# Altium PCB 加速度传感器-fa.PcbDoc
Units mm, origin at the board's own origin, x right, y up, seen from the top; angles counter-clockwise.
Board outline 152.4 x 101.6 mm, 2 copper layers (Top Layer, Bottom Layer); 11 components, 11 nets, 42 pads, 2 vias.
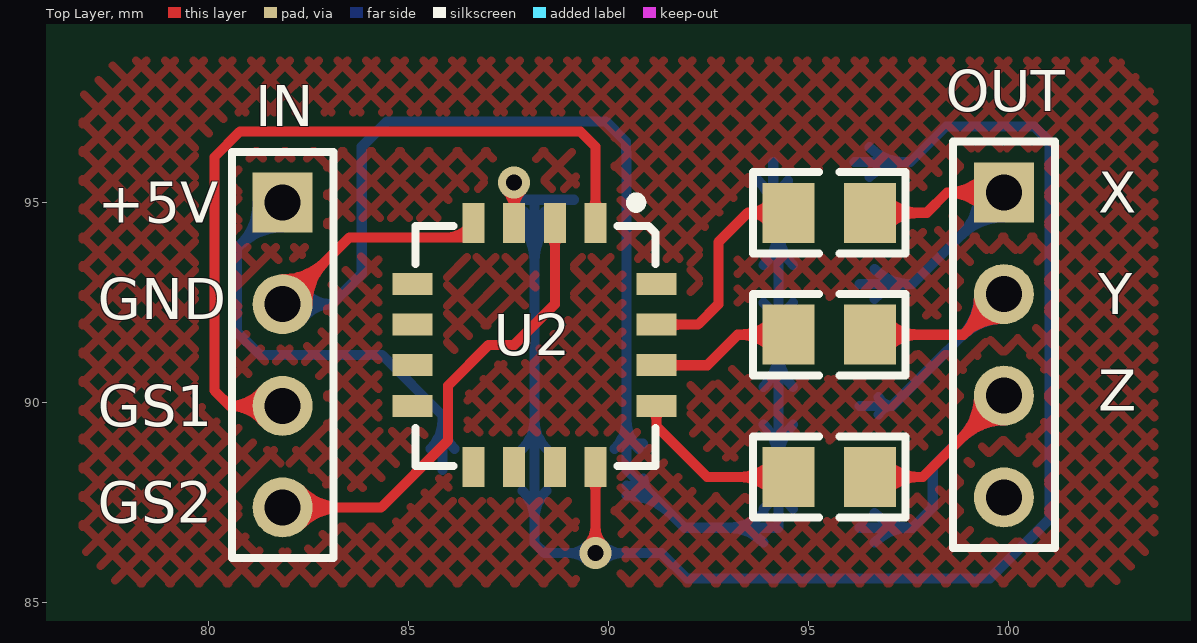
[diagram p0: Top Layer view]
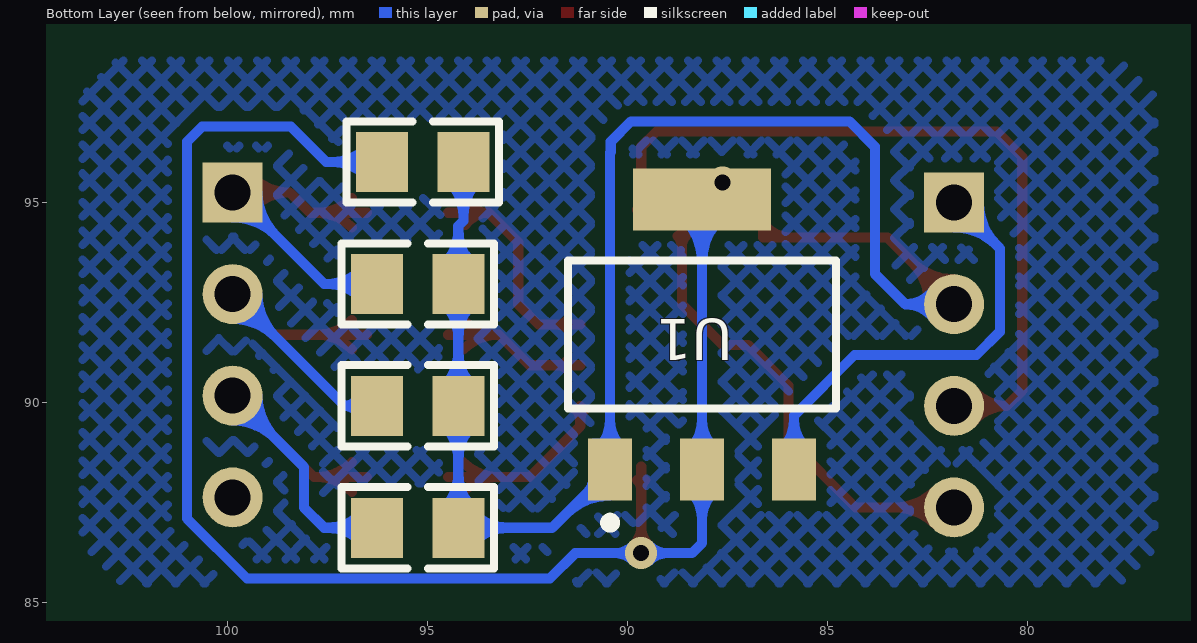
[diagram p1: Bottom Layer view, seen from below]

## Layer stack, top to bottom
Top Layer: signal copper 0.0356
Dielectric: dielectric 0.32, FR-4, Dk 4.8
Bottom Layer: signal copper 0.0356

## Board outline
25.4,25.4 177.8,25.4 177.8,127 25.4,127

## Design rules (kind name [scope] priority, off if disabled: settings)
Clearance [All] p1: gap=0.254
ComponentClearance [All] p1: gap=0.254 collisioncheckmode=3 verticalgap=0.254
PolygonConnect [All] p1: connectstyle=Relief reliefconductorwidth=0.254 reliefentries=4 polygonreliefangle="90 Angle"
RoomDefinition 加速度传感器 [InComponentClass('加速度传感器')] p1: confinementstyle=ConfineIn formatcopy=TRUE lockcomponents=FALSE outline 0,0 50.8,0 50.8,25.4 0,25.4
RoutingVias [All] p1: holewidth=0.711 width=1.27 viastyle="Through Hole" minholewidth=0.711 minwidth=1.27 maxholewidth=0.711 maxwidth=1.27
SolderMaskExpansion [All] p1: expansion=0.102
TestPointUsage [All] p1: valid=0 allowmultiple=FALSE
Testpoint [All] p1: side=15 testpointundercomponent=TRUE minsize=1.016 maxsize=2.54 preferedsize=1.524 minholesize=0 maxholesize=1.016 preferedholesize=0.813 testpointgrid=0.025 style=1023 order=0123456789
Width [All] p1: maxlimit=0.254 minlimit=0.254 preferedwidth=0.254
17 further rules are at their usual default settings.

## Classes and differential pairs
component class 加速度传感器: IN MMA7260 OUT U1 U2 U? ""

## Components (designator, comment, footprint, x,y, rotation, side; value= is the part's Value field where it differs from the comment)
C1 "CPDR" TP-0805-R 97.663,97.282 r0 bottom
C2 "CPDR" TP-0805-R 97.79,94.234 r0 bottom
C3 "CPDR" TP-0805-R 97.79,91.186 r0 bottom
C4 "CPDR" TP-0805-R 97.79,88.138 r0 bottom
IN "PZ_4" HDR-4 80.518,88.646 r270 top
OUT "PZ_4" HDR-4 98.552,88.9 r270 top
R1 "Res" TP-0805-R 98.044,93.472 r0 top
R2 "Res" TP-0805-R 98.044,90.424 r0 top
R3 "Res" TP-0805-R 98.044,86.868 r0 top
U1 "REG1117-3.3" ZZ311 88.138,91.694 r180 bottom
U2 "MMA7260" A7260 89.662,94.234 r270 top

## Footprints (in the part's own frame and the unit in brackets; to place one, negate y for a bottom-side part, rotate by r counter-clockwise, add the part's x,y. Pads: shape width x height; smd on the part's side, far side on the other; paste and mask are expansions set on the pad)
A7260 [mm] "加速度传感器"
  rect 1x0.55 smd: 1(-0.254,0) 2(-0.254,-1.016) 3(-0.254,-2.032) 4(-0.254,-3.048) 9(5.842,-3.048) 10(5.842,-2.032) 11(5.842,-1.016) 12(5.842,0)
  rect 0.55x1 smd: 5(1.27,-4.572) 6(2.286,-4.572) 7(3.302,-4.572) 8(4.318,-4.572) 13(4.318,1.524) 14(3.302,1.524) 15(2.286,1.524) 16(1.27,1.524)
  silkscreen extent -0.89,-4.5 5.82,1.5
HDR-4 [mm] "4排针"
  rect 1.5x1.5 hole 0.9: 1(-6.35,1.322)
  round 1.5 hole 0.9: 2(-3.81,1.322) 3(-1.27,1.322) 4(1.27,1.322)
  silkscreen extent -7.62,0.05 2.54,2.59
TP-0805-R [mm] "贴片0805"
  rect 1.3x1.5 smd: 1(-3.556,1.27) 2(-1.524,1.27)
  silkscreen extent -4.44,0.25 -0.63,2.29
ZZ311 [mm] "SOT-223/SC-73; 4 Leads; Body 6.7 x 7.3 mm, inc. leads (LxW max)"
  rect 1.1x1.55 smd: 1(-2.3,-3.375) 2(0,-3.375) 3(2.3,-3.375)
  rect 3.45x1.55 smd: 4(0,3.375)
  silkscreen extent -3.35,-4.82 3.35,1.85

## Part data
C1 C2 C3 C4: "瓷片电容"
IN: "排针——4"
OUT: library part PZ_3, "排针——3"
R1 R2 R3: "电阻"
U1: library part REG1117-5, "800mA and 1A Low Dropout Positive Regulator 2.85V, 3.3V, 5V, and Adjustable"

## Via types
v1: diameter 0.8, hole 0.4, Top Layer to Bottom Layer, 2 vias

## Nets (pads, with @x,y where several pads share a name; then routed paths per layer and width w, separated by ;. In a path a pad name is that pad's centre, name@x,y a point inside that pad or via, vN(x,y) a via of type N, cw(c..) or ccw(c..) an arc to the next point about the centre after c; other vN are vias at no path point)
GND: C1.1 C2.1 C3.1 C4.1 IN.2 U1.1 U2.4 | length 64.5
  Top Layer w0.254: IN.2 83.512,94.128 86.614,94.128 U2.4 ; IN.2@81.84,92.825 ccw(c81.84,93.716) 82.47,93.086 ccw(c83.1,92.456) IN.2@82.209,92.456 ; IN.2@81.84,93.079 ccw(c81.84,94.583) 82.904,93.52 ccw(c83.967,92.456) IN.2@82.463,92.456 ; 85.931,94.128 ccw(c85.931,94.946) U2.4@86.509,94.368
  Bottom Layer w0.254: IN.2 83.058,92.456 ; IN.2@82.345,92.091 cw(c83.058,91.577) 83.058,92.456 ; IN.2@82.345,92.821 ccw(c83.058,93.335) 83.058,92.456 ; U1.1@90.139,88.843 ccw(c89.417,89.565) 90.438,89.565 ccw(c91.459,89.565) U1.1@90.737,88.843 ; U1.1@90.438,87.671 cw(c90.438,86.107) 91.544,87.213 ; U1.1@90.438,87.925 cw(c90.438,86.974) 91.111,87.646 ; U1.1@90.438,88.967 U1.1@90.852,88.967 ; U1.1@90.861,88.094 ccw(c91.339,88.094) 91.001,87.756 ; C1.1@93.737,95.542 cw(c92.844,94.649) 94.107,94.649 cw(c95.37,94.649) C1.1@94.477,95.542 ; C4.1@93.864,86.498 ccw(c92.971,85.605) 92.971,86.868 ccw(c92.971,88.131) C4.1@93.864,87.238 ; C4.1@93.864,87.338 ccw(c92.971,88.231) 94.234,88.231 ccw(c95.497,88.231) C4.1@94.604,87.338 ; C3.1@93.864,89.446 cw(c92.971,88.553) 94.234,88.553 cw(c95.497,88.553) C3.1@94.604,89.446 ; C3.1@93.864,90.386 ccw(c92.971,91.279) 94.234,91.279 ccw(c95.497,91.279) C3.1@94.604,90.386 ; C2.1@93.864,92.494 cw(c92.971,91.601) 94.234,91.601 cw(c95.497,91.601) C2.1@94.604,92.494 ; C2.1@93.864,93.434 ccw(c92.971,94.327) 94.234,94.327 ccw(c95.497,94.327) C2.1@94.604,93.434 ; C1.1 94.107,94.539 94.234,94.412 C2.1 C3.1 C4.1 91.889,86.868 U1.1 90.438,96.252 90.424,96.266 90.424,96.52 89.916,97.028 84.455,97.028 83.82,96.393 83.82,93.218 83.058,92.456
NetC2_2: C2.2 OUT.1 R1.2 | length 19.3
  Top Layer w0.254: R1.2 97.942,94.742 98.45,95.25 ; R1.2@96.89,94.372 cw(c97.783,93.479) 97.783,94.742 cw(c97.783,96.005) R1.2@96.89,95.112 ; OUT.1@99.416,94.827 ccw(c98.45,93.935) 98.45,95.25 ; OUT.1@99.416,95.673 cw(c98.45,96.565) 98.45,95.25 ; OUT.1@99.603,95 ccw(c99.031,94.471) 99.031,95.25 ccw(c99.031,96.029) OUT.1@99.603,95.5 ; OUT.1 98.45,95.25
  Bottom Layer w0.254: C2.2 97.588,92.964 OUT.1 ; C2.2@96.636,92.594 cw(c97.529,91.701) 97.529,92.964 cw(c97.529,94.227) C2.2@96.636,93.334 ; OUT.1@99.251,95.25 cw(c97.747,95.25) 98.81,94.186 cw(c99.874,93.123) OUT.1@99.874,94.627 ; OUT.1@99.505,95.25 cw(c98.614,95.25) 99.244,94.62 cw(c99.874,93.99) OUT.1@99.874,94.881
NetC3_2: C3.2 OUT.2 R2.2 | length 18.6
  Top Layer w0.254: R2.2 98.858,91.694 ; R2.2@96.89,91.324 cw(c97.783,90.431) 97.783,91.694 cw(c97.783,92.957) R2.2@96.89,92.064 ; OUT.2@99.251,92.69 cw(c97.907,92.645) 98.858,91.694 ; OUT.2@99.505,92.698 cw(c98.709,92.672) 99.272,92.108 cw(c99.836,91.545) OUT.2@99.862,92.341 ; OUT.2@99.854,92.087 ccw(c99.809,90.743) 98.858,91.694 ; OUT.2 98.858,91.694
  Bottom Layer w0.254: C3.2 97.08,89.916 ; C3.2@96.742,89.699 cw(c97.08,89.544) 97.08,89.916 ; C3.2@96.742,90.133 ccw(c97.08,90.288) 97.08,89.916 ; OUT.2@99.251,92.71 cw(c97.747,92.71) 98.81,91.646 cw(c99.874,90.583) OUT.2@99.874,92.087 ; OUT.2@99.505,92.71 cw(c98.614,92.71) 99.244,92.08 cw(c99.874,91.45) OUT.2@99.874,92.341 ; OUT.2 97.08,89.916
NetC4_2: C4.2 OUT.3 R3.2 | length 21.3
  Top Layer w0.254: R3.2 97.842,88.138 OUT.3 ; R3.2@96.89,87.768 cw(c97.783,86.875) 97.783,88.138 cw(c97.783,89.401) R3.2@96.89,88.508 ; OUT.3@99.251,90.17 cw(c97.747,90.17) 98.81,89.106 cw(c99.874,88.043) OUT.3@99.874,89.547 ; OUT.3@99.505,90.17 cw(c98.614,90.17) 99.244,89.54 cw(c99.874,88.91) OUT.3@99.874,89.801
  Bottom Layer w0.254: C4.2 97.587,86.868 98.095,87.376 98.095,88.391 OUT.3 ; C4.2@96.636,86.498 cw(c97.529,85.605) 97.529,86.868 cw(c97.529,88.131) C4.2@96.636,87.238 ; OUT.3@99.251,90.17 cw(c97.747,90.17) 98.81,89.106 cw(c99.874,88.043) OUT.3@99.874,89.547 ; OUT.3@99.505,90.17 cw(c98.614,90.17) 99.244,89.54 cw(c99.874,88.91) OUT.3@99.874,89.801
NetIN_1: IN.1 U1.3 | length 16.4
  Bottom Layer w0.254: IN.1@81.217,94.996 cw(c79.713,94.996) 80.776,93.932 cw(c81.84,92.869) IN.1@81.84,94.373 ; IN.1@81.471,94.996 cw(c80.58,94.996) 81.21,94.366 cw(c81.84,93.736) IN.1@81.84,94.627 ; IN.1 80.696,93.852 80.696,91.77 81.28,91.186 84.328,91.186 85.838,89.676 U1.3 ; U1.3@85.539,88.843 ccw(c84.817,89.565) 85.838,89.565 ccw(c86.859,89.565) U1.3@86.137,88.843
NetIN_3: IN.3 U2.1 | length 23.2
  Top Layer w0.254: IN.3@81.36,89.519 ccw(c80.518,88.825) 80.518,89.916 ; IN.3@81.36,90.313 cw(c80.518,91.007) 80.518,89.916 ; IN.3@81.555,89.681 ccw(c81.057,89.27) 81.057,89.916 ccw(c81.057,90.562) IN.3@81.555,90.151 ; IN.3 80.518,89.916 ; U2.1@89.557,94.818 ccw(c89.305,95.07) 89.662,95.07 ccw(c90.019,95.07) U2.1@89.767,94.818 ; U2.1 89.662,96.393 89.281,96.774 80.772,96.774 80.137,96.139 80.137,90.297 80.518,89.916
NetIN_4: IN.4 U2.2 | length 16.1
  Top Layer w0.254: IN.4 84.303,87.376 85.979,89.052 85.979,90.424 86.995,91.44 87.63,91.44 88.646,92.456 U2.2 ; IN.4@82.101,87.115 cw(c82.731,86.485) 82.731,87.376 cw(c82.731,88.267) IN.4@82.101,87.637 ; IN.4@82.281,86.935 cw(c83.344,85.872) 83.344,87.376 cw(c83.344,88.88) IN.4@82.281,87.817 ; U2.2@88.541,94.158 cw(c88.289,93.906) 88.646,93.906 cw(c89.003,93.906) U2.2@88.751,94.158
NetR1_1: R1.1 U2.15 | length 7.3
  Top Layer w0.254: U2.15 92.227,91.948 92.735,92.456 92.735,94.005 93.472,94.742 ; U2.15@91.516,91.843 cw(c91.768,91.591) 91.768,91.948 cw(c91.768,92.305) U2.15@91.516,92.053 ; R1.1@94.062,94.438 ccw(c93.472,94.017) 93.472,94.742 ; R1.1@94.062,95.046 cw(c93.472,95.467) 93.472,94.742 ; R1.1 93.472,94.742
NetR2_1: R2.1 U2.14 | length 6.2
  Top Layer w0.254: U2.14 92.456,90.932 93.218,91.694 R2.1 ; U2.14@91.516,90.827 cw(c91.768,90.575) 91.768,90.932 cw(c91.768,91.289) U2.14@91.516,91.037 ; R2.1@94.118,91.324 ccw(c93.225,90.431) 93.225,91.694 ccw(c93.225,92.957) R2.1@94.118,92.064
NetR3_1: R3.1 U2.13 | length 6.9
  Top Layer w0.254: U2.13@91.081,89.811 cw(c90.829,89.559) 91.186,89.559 cw(c91.543,89.559) U2.13@91.291,89.811 ; U2.13 91.186,89.408 92.456,88.138 R3.1 ; R3.1@94.118,87.768 ccw(c93.225,86.875) 93.225,88.138 ccw(c93.225,89.401) R3.1@94.118,88.508
VCC: C1.2 U1.2 U1.4 U2.3 U2.12 | length 56.2
  Top Layer w0.254: v1@87.437,95.311 cw(c86.971,94.845) 87.63,94.845 cw(c88.289,94.845) v1@87.823,95.311 ; U2.3@87.525,94.818 ccw(c87.273,95.07) 87.63,95.07 ccw(c87.987,95.07) U2.3@87.735,94.818 ; U2.3 v1(87.63,95.504) ; v1@89.469,86.426 ccw(c89.003,86.892) 89.662,86.892 ccw(c90.321,86.892) v1@89.855,86.426 ; U2.12@89.557,88.062 cw(c89.305,87.81) 89.662,87.81 cw(c90.019,87.81) U2.12@89.767,88.062 ; v1(89.662,86.233) U2.12
  Bottom Layer w0.254: U1.4@87.68,94.611 cw(c86.574,93.505) 88.138,93.505 cw(c89.702,93.505) U1.4@88.596,94.611 ; U1.4@87.782,95.069 U1.4 ; U1.2@87.839,87.795 cw(c87.117,87.073) 88.138,87.073 cw(c89.159,87.073) U1.2@88.437,87.795 ; U1.2@87.839,88.843 ccw(c87.117,89.565) 88.138,89.565 ccw(c89.159,89.565) U1.2@88.437,88.843 ; U1.4@87.859,94.79 cw(c87.187,94.118) 88.138,94.118 cw(c89.089,94.118) U1.4@88.417,94.79 ; U1.4@89.129,95.069 U1.4 ; v1@89.469,86.04 ccw(c89.003,85.574) 89.003,86.233 ccw(c89.003,86.892) v1@89.469,86.426 ; v1@89.855,86.04 cw(c90.321,85.574) 90.321,86.233 cw(c90.321,86.892) v1@89.855,86.426 ; C1.2 97.536,96.012 98.425,96.901 100.635,96.901 101.016,96.52 101.016,87.097 99.517,85.598 91.948,85.598 91.313,86.233 88.392,86.233 88.138,86.487 U1.2 U1.4 ; C1.2@96.509,95.642 cw(c97.402,94.749) 97.402,96.012 cw(c97.402,97.275) C1.2@96.509,96.382
pads on no net: OUT.4 U2.5 U2.6 U2.7 U2.8 U2.9 U2.10 U2.11 U2.16

## Polygon pours and split planes (outlines as drawn)
no net on Top Layer (hatched 45Degree grid 0.508 track 0.203): 76.835,97.663 77.724,98.552 102.743,98.552 103.632,97.663 103.632,86.487 102.616,85.471 77.724,85.471 76.962,86.233 76.835,86.36
no net on Bottom Layer (hatched 45Degree grid 0.508 track 0.203): 76.835,86.36 76.835,97.663 77.724,98.552 102.743,98.552 103.632,97.663 103.632,86.487 102.616,85.471 77.724,85.471

## Silkscreen, mask and mechanical layers (free items; w line width, h text height)
Top Overlay:
  text "X" at 102.235,94.742 h1.02
  text "+5V" at 77.216,94.488 h1.02
  text "Y" at 102.235,92.202 h1.02
  text "GND" at 77.216,92.075 h1.02
  text "Z" at 102.235,89.789 h1.02
  text "GS1" at 77.216,89.408 h1.02
  text "GS2" at 77.216,86.995 h1.02
Mechanical 1:
  lines w0.254: 76.454,85.979 77.47,84.963 102.87,84.963 104.14,86.233 104.14,97.917 102.997,99.06 77.47,99.06 76.454,98.044 76.454,85.979